# Altium PCB IMU_LSM9DS1_PCB.PcbDoc
Units mm, origin at the board's own origin, x right, y up, seen from the top; angles counter-clockwise.
Board outline 12 x 12 mm, 2 copper layers (Top Layer, Bottom Layer), stack 1.569 mm thick; 8 components, 11 nets, 54 pads, 21 vias.
Unrouted connection lines stored in the file: 1.
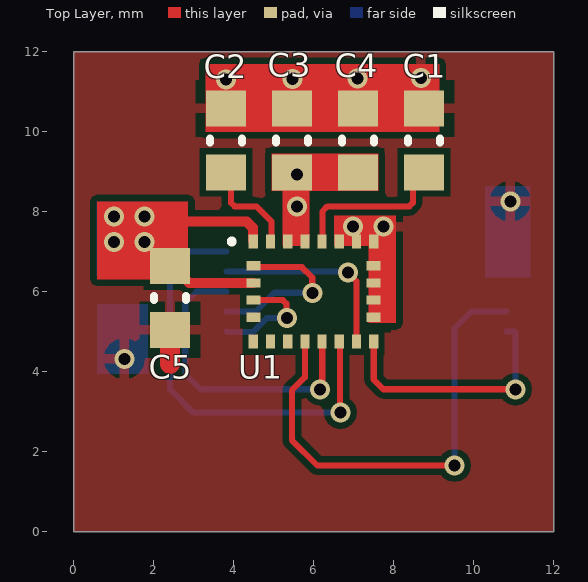
[diagram p0: Top Layer view]
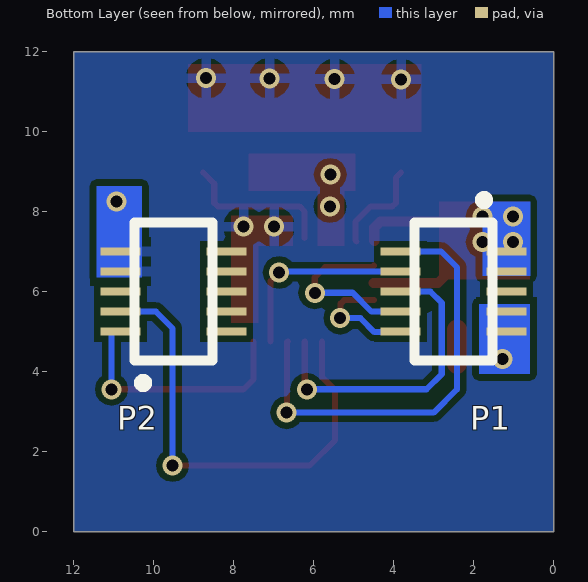
[diagram p1: Bottom Layer view, seen from below]

## Layer stack, top to bottom
Top Solder: solder mask 0.0254, SM-001, Dk 4
Top Layer: signal copper 0.035
Dielectric 1: core 1.4986, Core-043, Dk 4.3
Bottom Layer: signal copper 0.035
Bottom Solder: solder mask 0.0254, SM-001, Dk 4

## Board outline
0,0 12,0 12,12 0,12

## Design rules (kind name [scope] priority, off if disabled: settings)
Clearance [All] p1: gap=0.152 ignorepadtopadclearanceinfootprint=FALSE
HoleToHoleClearance [All] p1: gap=0 allowstackedmicrovias=TRUE
MinimumSolderMaskSliver [All] p1: minsoldermaskwidth=0
PlaneConnect [All] p1: planeconnectstyle=Direct reliefexpansion=0.508 reliefentries=4 reliefconductorwidth=0.254 reliefairgap=0.254
PolygonConnect [All] p1: connectstyle=Relief reliefconductorwidth=0.254 reliefentries=4 polygonreliefangle="90 Angle" airgapwidth=0.254
RoutingVias [All] p1: holewidth=0.3 width=0.5 viastyle="Through Hole" minholewidth=0.3 minwidth=0.5 maxholewidth=0.5 maxwidth=1
SilkToSilkClearance [All] p1: silktosilkclearance=0
SilkToSolderMaskClearance [IsPad] p1: minsilkscreentomaskgap=0 clearancetoexposedcopper=TRUE
SolderMaskExpansion [All] p1: expansion=0.102 istentingtop=FALSE
Width [All] p1: maxlimit=1.27 minlimit=0.102 preferedwidth=0.152
25 further rules are at their usual default settings.

## Components (designator, comment, footprint, x,y, rotation, side; value= is the part's Value field where it differs from the comment)
C1 "10nF 16V" CAPC0603(1608)100_N 8.763,9.779 r270 top value=100nF
C2 "100nF" CAPC0603(1608)100_N 3.81,9.779 r270 top
C3 "10uF" CAPC0603(1608)100_N 5.461,9.779 r270 top value=100nF
C4 "100nF" CAPC0603(1608)100_N 7.112,9.779 r270 top
C5 "100nF" CAPC0603(1608)100_N 2.413,5.842 r90 top locked
P1 "5*2 公头" "10pin 公头" 2.5,6 r270 bottom locked
P2 "5*2 公头" "10pin 公头" 9.5,6 r90 bottom locked
U1 "LSM9DS1TR" STM-LGA-24_3500X3000X1000 6,6 r0 top

## Footprints (in the part's own frame and the unit in brackets; to place one, negate y for a bottom-side part, rotate by r counter-clockwise, add the part's x,y. Pads: shape width x height; smd on the part's side, far side on the other; paste and mask are expansions set on the pad)
"10pin 公头" [mm] "0.5mm间距，180度接插件"
  rect 0.2x1 smd mask+0.1: 1(-1,1.325) 6(-1,-1.325)
  rect 0.2x1 smd: 2(-0.5,1.325) 3(0,1.325) 4(0.5,1.325) 5(1,1.325) 7(-0.5,-1.325) 8(0,-1.325) 9(0.5,-1.325) 10(1,-1.325)
  silkscreen extent -2.39,-0.97 1.73,0.97
CAPC0603(1608)100_N [mm]
  rect 0.9x1 smd: 1(-0.8,0) 2(0.8,0)
  silkscreen extent -0.05,-0.4 0.05,0.4, body extent -0.87,-0.48 0.88,0.47, height 1
STM-LGA-24_3500X3000X1000 [mm] "LGA, 24-Leads, Body 3.65x3.15mm, Pitch 0.43mm"
  rect 0.23x0.35 smd mask+0.05: 1(-1.505,1.25) 6(-1.505,-1.25) 7(-1.075,-1.25) 8(-0.645,-1.25) 9(-0.215,-1.25) 10(0.215,-1.25) 11(0.645,-1.25) 12(1.075,-1.25) 13(1.505,-1.25) 18(1.505,1.25) 19(1.075,1.25) 20(0.645,1.25) 21(0.215,1.25) 22(-0.215,1.25) 23(-0.645,1.25) 24(-1.075,1.25)
  rect 0.35x0.23 smd mask+0.05: 2(-1.505,0.645) 3(-1.505,0.215) 4(-1.505,-0.215) 5(-1.505,-0.645) 14(1.505,-0.645) 15(1.505,-0.215) 16(1.505,0.215) 17(1.505,0.645)
  silkscreen extent -2.11,1.19 -1.98,1.31, body extent -1.82,-1.57 1.83,1.58, height 1.03

## Part data
C1 C2 C3 C4 C5: library part CMP-1035-02588-1, "CAP 10nF 16V ±10% 0603", Case-EIA=0603, Case-Metric=1608, Manufacturer="Vishay Vitramon", Manufacturer Part Number=VJ0603Y104KNXAO, Rated Voltage="25 V", Tolerance=Â±10%, Max Thickness="1 mm", Technology=SMT
U1: library part CMP-2000-06606-1, "iNEMO Inertial Module: 3D Accelerometer, 3D Gyroscope, 3D Magnetometer, 1.9 to 3.6 V, -40 to 85 degC, 24-Pin LGA, RoHS, Tape and Reel", Manufacturer=STMicroelectronics, Package Description="24-Pin Plastic Land Grid Array Package, Body 3.65 x 3.15 mm, Pitch 0.43 mm", Package Reference=LGA-24_3500X3000X1000, PartNumber=LSM9DS1, Sensor Case Style=LGA, Supply Voltage Max=3.6V, Supply Voltage Min=1.9V, Acceleration Range=±2g,±4g,±8g,±16g, Datasheet URL=http://www2.st.com/content/ccc/resource/technical/document/datasheet/1e/3f/2a/d6/25/eb/48/46/DM00103319.pdf/files/DM00103319.pdf/jcr:content/translations/en.DM00103319.pdf, Datasheet Version="Rev. 3, 03/2015", Gyroscope Range=±245°/s,±500°/s,±2000°/s, Manufacturer URL=http://www.st.com/, MEMS Module Function=Tri-AxisGyroscope,Tri-AxisAccelerometer,Tri-AxisMagnetometer, Mounting Technology=SurfaceMount, MSL=MSL3-168hours, No. of Pins=24Pins, Packaging=CutTape, Product Range=-, SVHC=NoSVHC(17-Dec-2015)

## Via types
v1: diameter 0.5, hole 0.3, Top Layer to Bottom Layer, 21 vias

## Nets (pads, with @x,y where several pads share a name; then routed paths per layer and width w, separated by ;. In a path a pad name is that pad's centre, name@x,y a point inside that pad or via, vN(x,y) a via of type N, cw(c..) or ccw(c..) an arc to the next point about the centre after c; other vN are vias at no path point)
3.3VD: C3.2 C4.2 C5.2 P1.1 P1.2 U1.1 U1.3 U1.22 U1.23 | length 4.7
  Top Layer w0.254: C5.2 2.463,6.642 2.89,6.215 U1.3 ; 2.54,7.546 2.741,7.747 4.334,7.747 4.483,7.598 U1.1@4.483,7.262
  other v1: 1.016,7.239 1.778,7.239 1.016,7.874 1.778,7.874 5.588,8.128 5.581,8.926
A/G_DATA_READY: P2.1 U1.13 | length 6.3
  Top Layer w0.152: U1.13 7.505,3.798 7.747,3.556 v1(11.049,3.556)
  Bottom Layer w0.152: P2.1 11.025,5 11.049,4.976 v1(11.049,3.556)
GND: C1.1 C2.1 C3.1 C4.1 C5.1 P1.4 P1.5 P2.4 P2.5 U1.14 U1.15 U1.16 U1.17 U1.18 U1.19 U1.20 | length 0.9
  Top Layer w0.508: 2.413,4.191 C5.1
  other v1: 1.27,4.318 6.985,7.62 7.747,7.62 10.922,8.255 3.81,11.303 5.473,11.312 7.096,11.331 8.683,11.335
I2C_SCL: P1.9 U1.2 | length 4.3
  Top Layer w0.152: U1.2 4.531,6.609 5.71,6.609 5.969,6.35 v1(5.969,5.969)
  Bottom Layer w0.152: P1.9 4.554,5.5 5.023,5.969 v1(5.969,5.969)
I2C_SDA: P1.10 U1.4 | length 2.9
  Top Layer w0.152: U1.4 5.234,5.785 5.324,5.696 5.324,5.344 v1(5.334,5.334)
  Bottom Layer w0.152: P1.10 3.839,4.986 4.478,4.986 4.826,5.334 v1(5.334,5.334)
INT_A: P1.6 U1.11 | length 10.9
  Top Layer w0.152: U1.11 6.658,4.737 6.658,2.986 v1(6.671,2.973)
  Bottom Layer w0.152: P1.6 2.809,7 2.413,6.604 2.413,3.556 2.996,2.973 v1(6.671,2.973)
INT_G: P1.7 U1.12 | length 4.9
  Top Layer w0.152: v1(6.858,6.477) 7.075,6.26 U1.12
  Bottom Layer w0.152: P1.7 6.835,6.5 v1(6.858,6.477)
INT_M: P1.8 U1.10 | length 7.7
  Top Layer w0.152: v1(6.166,3.556) 6.219,3.609 6.219,4.746 U1.10
  Bottom Layer w0.152: P1.8 3.079,6 2.794,5.715 2.794,3.937 3.175,3.556 v1(6.166,3.556)
M_DATA_READY: P2.2 U1.9 | length 11.8
  Top Layer w0.152: U1.9 5.785,3.851 5.461,3.527 5.461,2.286 6.096,1.651 v1(9.525,1.651)
  Bottom Layer w0.152: v1(9.525,1.651) 9.525,5.08 9.945,5.5 P2.2
NetC1_2: C1.2 U1.21 | length 3.9
  Top Layer w0.152: U1.21@6.223,7.336 6.223,8.001 6.349,8.127 8.393,8.127 8.482,8.216 8.482,8.698 C1.2
NetC2_2: C2.2 U1.24 | length 2.5
  Top Layer w0.152: C2.2 3.937,8.852 3.937,8.217 4.026,8.128 4.572,8.128 4.953,7.747 4.953,7.278 U1.24
pads on no net: P1.3 P2.3 P2.6 P2.7 P2.8 P2.9 P2.10 U1.5 U1.6 U1.7 U1.8

## Polygon pours and split planes (outlines as drawn)
GND on Top Layer "GND_L01_P000" (solid, pour order 0): 0,0 0,12 12,12 12,0
GND on Bottom Layer "GND_L02_P001" (solid, pour order 1): 0,0 0,12 12,12 12,0

## Other copper
Top Layer:
  rectangle net 3.3VD: 0.584,6.303 2.868,8.255
  rectangle net GND: 6.511,7.136 8.063,7.898
  rectangle net 3.3VD: 4.953,8.509 7.62,9.449
  rectangle net GND: 7.375,5.207 8.068,7.884
  rectangle net 3.3VD: 5.224,7.137 5.894,9.236
  rectangle net GND: 3.302,9.992 9.144,11.684
Bottom Layer:
  rectangle net GND: 0.584,3.937 1.864,5.685
  rectangle net 3.3VD: 0.58,6.388 1.778,8.255
  rectangle net GND: 10.287,6.35 11.43,8.636

## Silkscreen, mask and mechanical layers (free items; w line width, h text height)
Mechanical 1:
  the board outline again, w0.254